# Altium PCB Final_Power.PcbDoc (part 2 of 2)
Units mil, origin at the board's own origin, x right, y up, seen from the top; angles counter-clockwise.
Board outline 5500 x 3000 mil, 4 copper layers (Top Layer, GND, Signal Layer 1, Bottom Layer), stack 30.634 mil thick; 139 components, 95 nets, 471 pads, 147 vias.
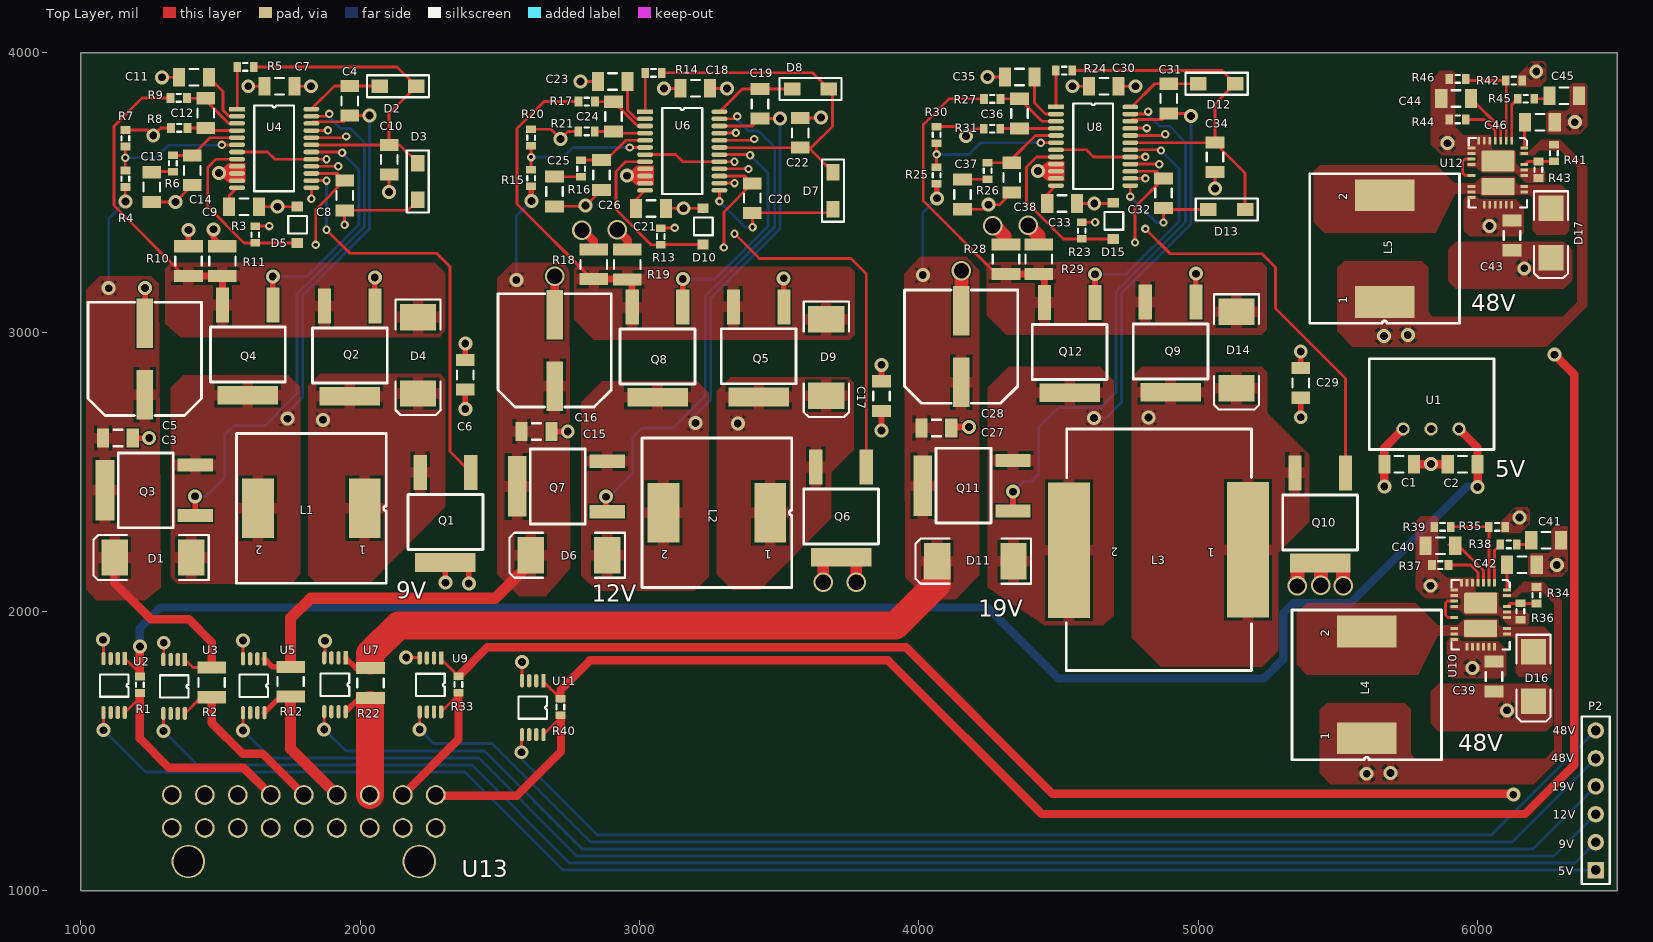
[diagram p0: Top Layer view]

## Silkscreen, mask and mechanical layers (free items; w line width, h text height)
Top Overlay:
  text "48V" at 5978,3075 h60
  text "5V" at 6063,2481 h60
  text "9V" at 2130,2045 h60
  text "12V" at 2829,2035 h60
  text "19V" at 4213,1981 h60
  text "48V" at 6269,1558 h30
  text "48V" at 5930,1500 h60
  text "48V" at 6263,1461 h30
  text "19V" at 6266,1359 h30
  text "12V" at 6269,1258 h30
  text "9V" at 6291,1152 h30
  text "5V" at 6289,1056 h30
Mechanical 1:
  the board outline again, w47.24
Mechanical 15:
  lines w10: 1000,1000 1250,1000 6500,1000 6500,4000 1000,4000 1000,1000

## Text inside footprints (layer, text, board x,y; h text height)
L1: Top Overlay "1" at 2022.31,2235.14 h30 r180; Top Overlay "2" at 1652.23,2235.14 h30 r180
L2: Top Overlay "1" at 3473.85,2219.48 h30 r180; Top Overlay "2" at 3103.77,2219.48 h30 r180
L3: Top Overlay "1" at 5059.89,2226.12 h30 r180; Top Overlay "2" at 4713.43,2228.87 h30 r180
L4: Top Overlay "2" at 5469.09,1910.23 h30 r90; Top Overlay "1" at 5469.09,1540.15 h30 r90
L5: Top Overlay "1" at 5533.14,3102.15 h30 r90; Top Overlay "2" at 5533.14,3472.23 h30 r90